# Altium PCB Transmitter .PcbDoc
Units mm, origin at the board's own origin, x right, y up, seen from the top; angles counter-clockwise.
Board outline 55.3 x 85.53 mm, 2 copper layers (Top Layer, Bottom Layer); 41 components, 32 nets, 141 pads, 30 vias.
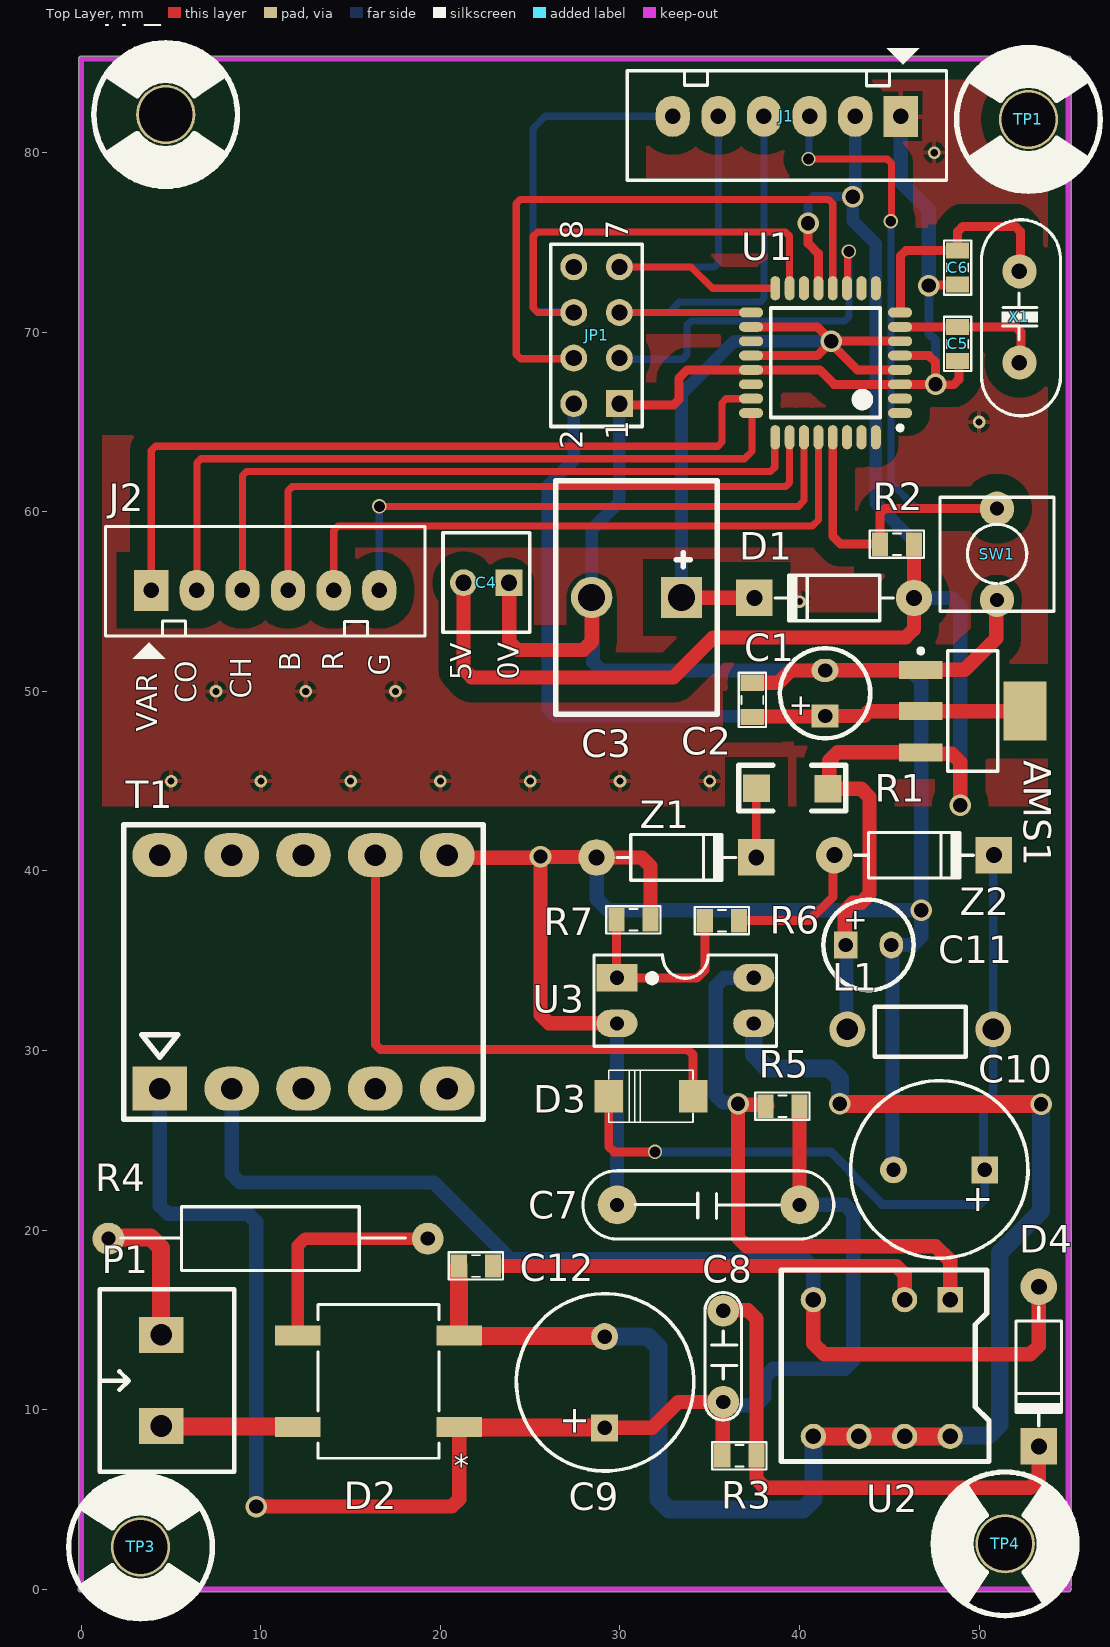
[diagram p0: Top Layer view]
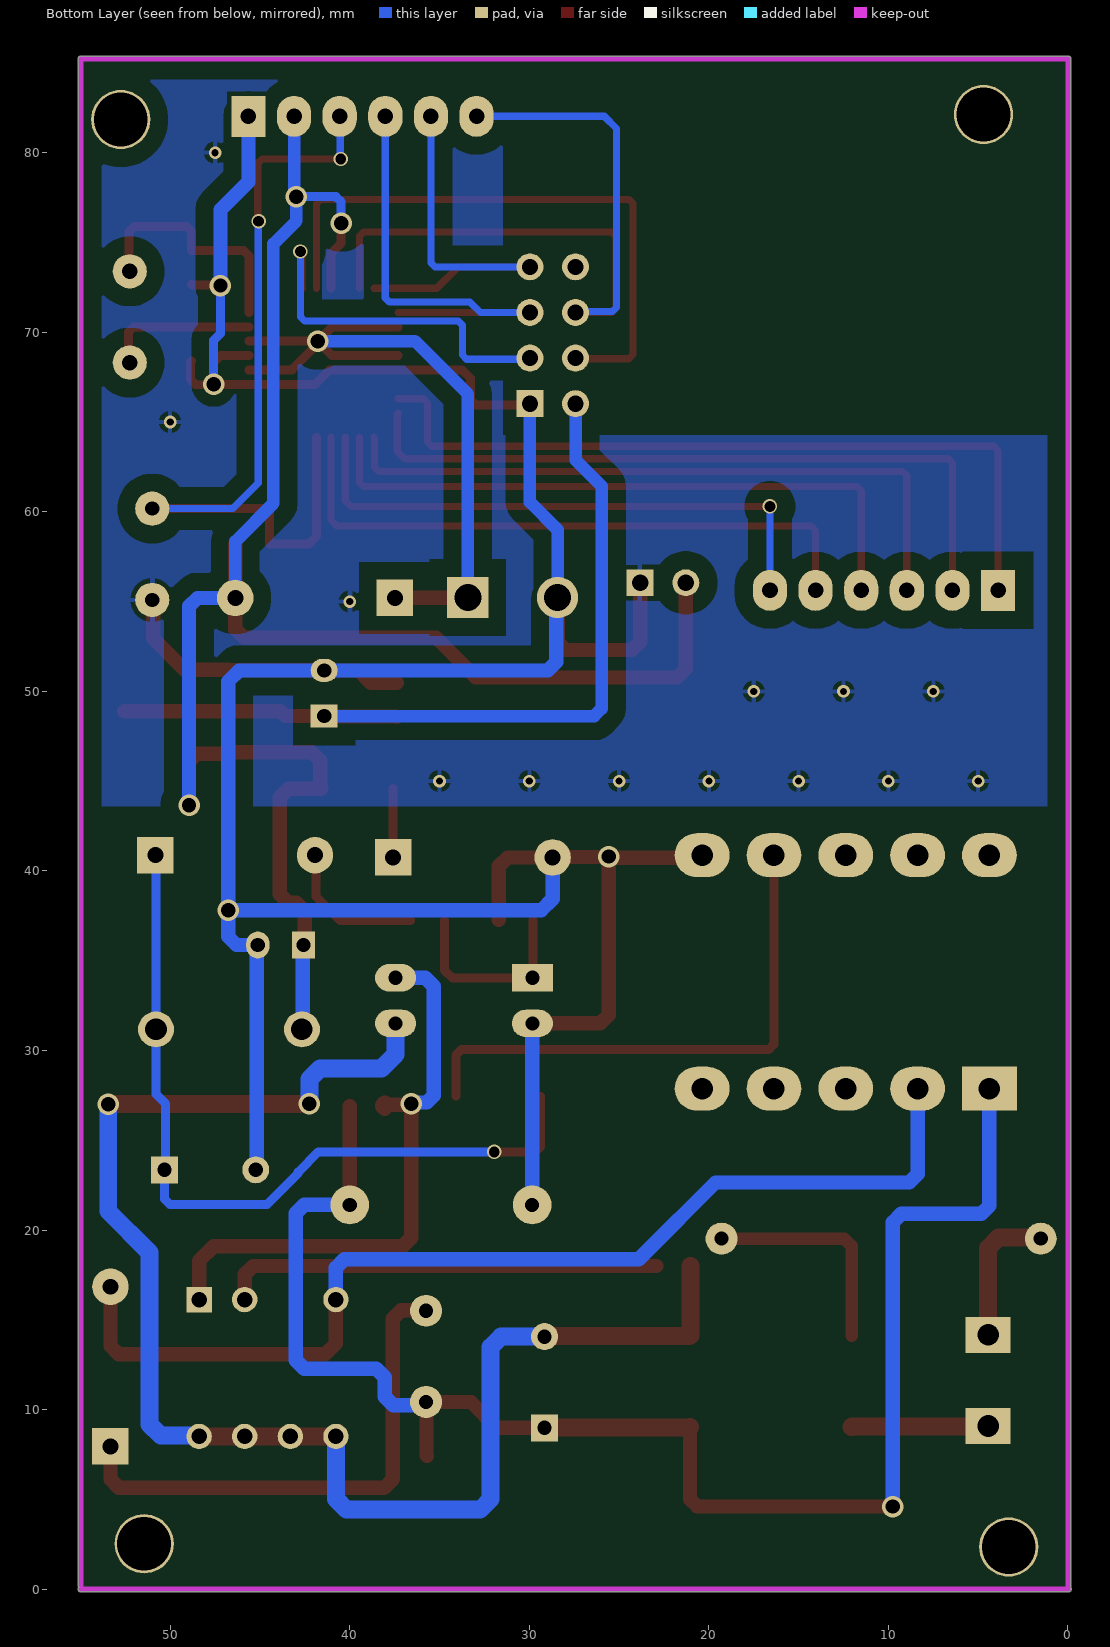
[diagram p1: Bottom Layer view, seen from below]
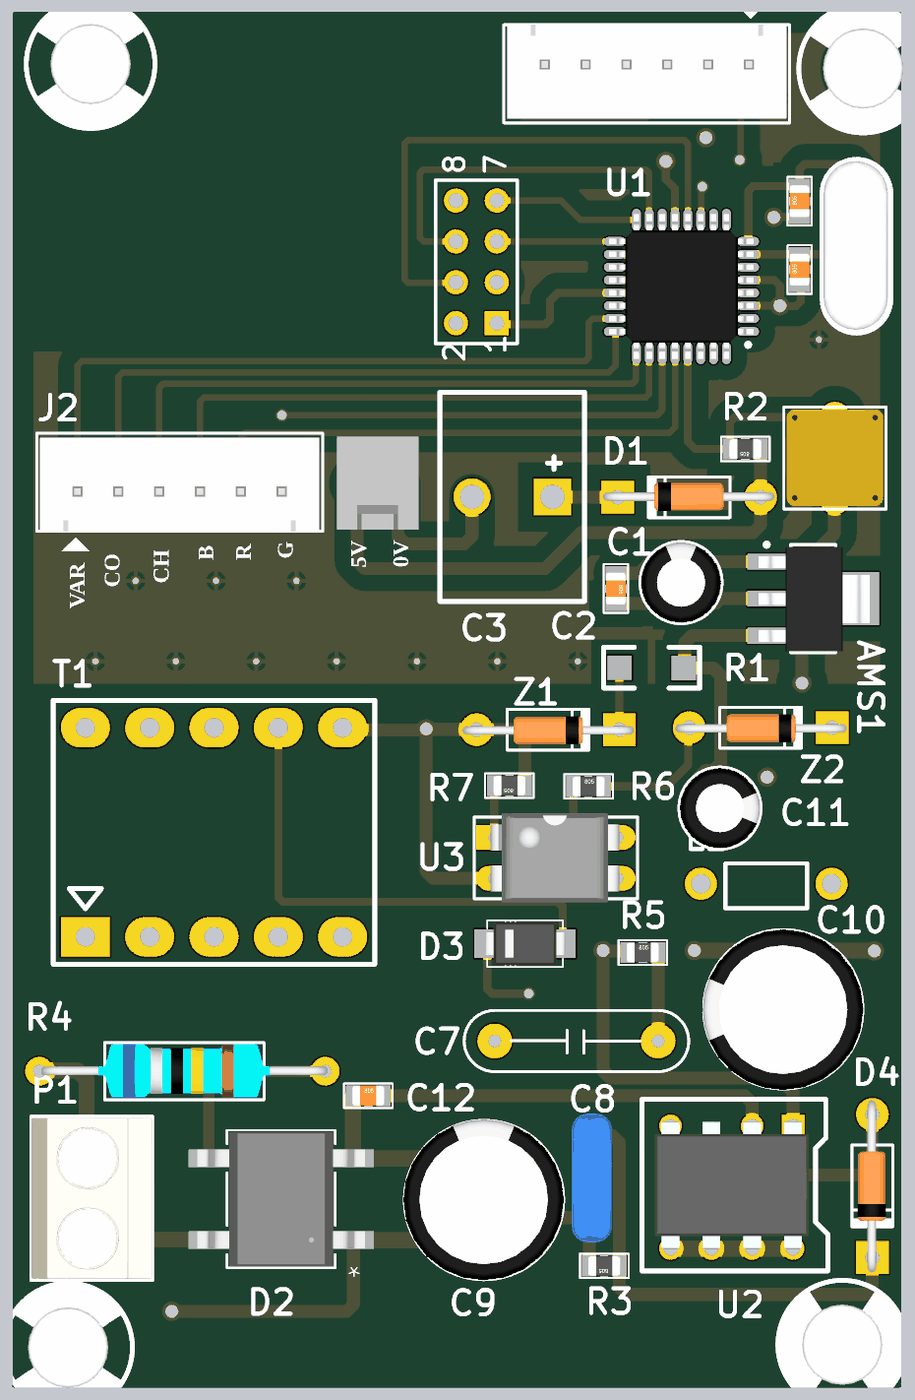
[diagram p2: 3D render of the assembled board from above, using the file's embedded part models]

## Layer stack, top to bottom
Top Solder: solder mask 0.0102, Solder Resist, Dk 3.5
Top Layer: signal copper 0.0356
Dielectric 1: dielectric 0.32, FR-4, Dk 4.8
Bottom Layer: signal copper 0.0356
Bottom Solder: solder mask 0.0102, Solder Resist, Dk 3.5

## Board outline
-0.15,0.083 ccw(c-0.025,0) -0.025,-0.15 54.975,-0.15 ccw(c54.975,0) 55.125,0 ccw(c54.975,0) 55.075,0.112 ccw(c54.975,0.225) 55.125,0.225 55.125,85.225 ccw(c54.975,85.225) 54.975,85.375 0,85.375 ccw(c0,85.225) -0.15,85.225

## Design rules (kind name [scope] priority, off if disabled: settings)
Clearance [All] p1: gap=1 ignorepadtopadclearanceinfootprint=FALSE
PolygonConnect [All] p1: connectstyle=Relief reliefconductorwidth=0.254 reliefentries=4 polygonreliefangle="90 Angle" airgapwidth=0.254
RoutingVias [InNetClass('AC')] p1: holewidth=0.8 width=1.2 viastyle="Through Hole" minholewidth=0.8 minwidth=1.2 maxholewidth=0.8 maxwidth=1.2
RoutingVias RoutingVias_1 [InNetClass('DC')] p2: holewidth=0.8 width=1.2 viastyle="Through Hole" minholewidth=0.8 minwidth=1.2 maxholewidth=0.8 maxwidth=1.2
RoutingVias RoutingVias_2 [InNetClass('All Nets')] p3: holewidth=0.6 width=0.8 viastyle="Through Hole" minholewidth=0.6 minwidth=0.8 maxholewidth=0.6 maxwidth=0.8
SolderMaskExpansion [All] p1: expansion=0.102 istentingtop=FALSE
Width [InNetClass('AC')] p1: maxlimit=1 minlimit=0.7 preferedwidth=0.8
Width Width_1 [InNetClass('DC')] p2: maxlimit=0.8 minlimit=0.5 preferedwidth=0.7
Width Width_2 [InNetClass('All Nets')] p3: maxlimit=0.5 minlimit=0.3 preferedwidth=0.4
30 further rules are at their usual default settings.

## Components (designator, comment, footprint, x,y, rotation, side; value= is the part's Value field where it differs from the comment)
AMS1 "AMS1117 3V3" SOT223-4N 49.65,48.9 r0 top
C1 "22uF" C5mm 41.425,49.895 r90 top
C2 "104" CN-SMD-0805 37.375,49.525 r270 top
C3 "0.1F" "SUP CAP" 33.425,55.225 r180 top
C4 "Header2" HDR2 23.825,56.05 r180 top
C5 "22P" CN-SMD-0805 48.8,69.35 r90 top value=100pF
C6 "22P" CN-SMD-0805 48.8,73.6 r90 top value=100pF
C7 "1nF" CN4 40,21.4 r180 top value=0,047uF
C8 "1nF" CN2 35.75,15.505 r270 top value=0.1uF
C9 "4.7uF 400V" C10mm 29.15,11.525 r90 top
C10 "470uF 25V" C10mm 47.775,23.35 r180 top
C11 "Cap Pol 5mm" C5mm 43.845,35.875 r0 top
C12 "104" CN-SMD-0805 21.975,18 r0 top
D1 "1N4007" D1A 46.375,55.2 r0 top
D2 "Diode bridge" DS207S 16.55,11.575 r180 top
D3 "SS16" SS14 31.725,27.45 r180 top
D4 "FR107" D1A 53.325,16.84 r90 top value=1N4007
J1 "ISP" Header6 45.64,82.025 r180 top
J2 "ISP" Header6 3.895,55.625 r0 top
JP1 "nRF24L01+" HDR2X4 29.965,66.02 r90 top
L1 "Ferrit Bead" "CUON CAM" 46.725,31.175 r180 top
P1 "Header 2 - M" "Medium - Header 2" 4.45,11.625 r90 top
R1 "0R" 1206_R 39.734,44.956 r0 top value="R1/4W - 1K"
R2 "10K" RES-SMD-0805 45.425,58.2 r180 top value="R1/4W - 1K"
R3 "47k" RES-SMD-0805 36.65,7.425 r180 top value="R1/4W - 1K"
R4 "10R" RES-1W-LONG 10.15,19.65 r0 top value="R1W - 100"
R5 "4M" RES-SMD-0805 39.05,26.9 r0 top value="R1/4W - 1K"
R6 "390" RES-SMD-0805 35.675,37.225 r0 top value="R1/4W - 1K"
R7 "2k" RES-SMD-0805 30.75,37.275 r180 top value="R1/4W - 1K"
SW1 "SW" SW2 51,60.175 r270 top value="SW chip 2 pin"
T1 "EE25" "EE19 5+5" 4.375,27.875 r0 top
TP1 "1" "Holle 3mm 8mm" 52.75,81.85 r0 top
TP2 "1" "Holle 3mm 8mm" 4.7,82.125 r0 top
TP3 "1" "Holle 3mm 8mm" 3.3,2.35 r0 top
TP4 "1" "Holle 3mm 8mm" 51.45,2.525 r90 top
U1 "ATmega328-AU" TQFP32 41.45,68.3 r180 top
U2 "TNY276" PCBComponent_1 44.834,12.442 r270 top
U3 "PC817" DIP4/W0.3 29.83,34.05 r270 top
X1 "16Mhz" XT2 52.25,70.85 r270 top value=4Mhz
Z1 "4.3V" D1A 28.7,40.75 r180 top
Z2 "5V" D1A 41.935,40.875 r180 top

## Footprints (in the part's own frame and the unit in brackets; to place one, negate y for a bottom-side part, rotate by r counter-clockwise, add the part's x,y. Pads: shape width x height; smd on the part's side, far side on the other; paste and mask are expansions set on the pad)
1206_R [mil]
  rect 60x60 smd: 1(-84,-14) 2(73,-15)
  silkscreen extent -123,-64 112,36
C5mm [mm]
  rect 1.3x1.5 hole 0.8: 1(-1.27,0)
  oval 1.3x1.5 hole 0.8: 2(1.27,0)
  silkscreen extent -2.51,-2.51 2.51,2.51, body extent -2.5,-2.5 2.49,2.5, height 11.01
C10mm [mm]
  rect 1.5x1.5 hole 0.8: 1(-2.54,0)
  round 1.5 hole 0.8: 2(2.54,0)
  silkscreen extent -4.95,-4.96 4.93,4.92, body extent -5,-5 4.97,5, height 20.01
CN2 [mil]
  round 70 hole 31: 1(0,0) 2(200,0)
  silkscreen extent -40,-40 240,40, body extent -54,-44 260,55, height 407
CN4 [mil] "Cap np W 0.4"
  round 85 hole 31: 1(0,0) 2(400,0)
  silkscreen extent -75,-75 475,75
CN-SMD-0805 [mm]
  rect 0.9x1.3 smd: 1(-0.95,0) 2(0.95,0)
  silkscreen extent -1.51,-0.76 1.51,0.76, body extent -1,-0.62 1,0.63, height 0.8
"CUON CAM" [mm] "Dang cam giong tro"
  round 2 hole 1.2: 1(-4.064,0) 2(4.064,0)
  silkscreen extent -2.54,-1.27 2.54,1.52
D1A [mil] "Diode 1A, W 100mil, L 350mil"
  round 80 hole 35: 1(0,0)
  rect 80x80 hole 35: 2(-350,0)
  silkscreen extent -305,-50 -45,50, body extent -386,-33 34,36, height 84
DIP4/W0.3 [mil] "4 PIN, W 300mil, Pin to pin 100mil"
  rect 60x90 hole 31: 1(0,0)
  oval 60x90 hole 31: 2(100,0) 3(100,300) 4(0,300)
  silkscreen extent -50,-50 150,350, body extent -59,-10 159,305, height 170
DS207S [mm]
  rect 2.518x1.117 smd paste+0 mask+0: 1(-4.498,2.54) 2(-4.498,-2.54) 3(4.498,-2.54) 4(4.498,2.54)
  silkscreen extent -3.37,-4.28 3.37,4.28, body extent -5.21,-4.15 5.21,4.15, height 3.63
"EE19 5+5" [mm]
  rect 3.05x2.45 hole 1.2 paste+0 mask+0.102: 1(0,0)
  oval 3.05x2.45 hole 1.2 paste+0 mask+0.102: 2(4,0) 3(8,0) 4(12,0) 5(16,0) 6(16,13) 7(12,13) 8(8,13) 9(4,13) 10(0,13)
  silkscreen extent -2,-1.7 18,14.7
HDR2 [mm] "Connector; Header; 2 Position"
  rect 1.5x1.5 hole 0.9: 1(0,0)
  round 1.5 hole 0.9: 2(2.54,0)
  silkscreen extent -1.14,-2.79 3.68,2.77, body extent -1.27,-2.92 3.81,2.88, height 11.72
HDR2X4 [mm] "Connector; Header; 4x2 Position"
  rect 1.5x1.5 hole 0.9: 1(0,0)
  round 1.5 hole 0.9: 2(0,2.54) 3(2.54,0) 4(2.54,2.54) 5(5.08,0) 6(5.08,2.54) 7(7.62,0) 8(7.62,2.54)
  silkscreen extent -1.27,-1.27 8.89,3.81
Header6 [mil] "CON6"
  rect 75x90 hole 34: 1(0,0)
  oval 75x90 hole 34: 2(100,0) 3(200,0) 4(300,0) 5(400,0) 6(500,0)
  silkscreen extent -100,-150 600,140, body extent -92,-101 592,129, height 284
"Holle 3mm 8mm" [mm] "Holle 3mm, outline 8mm"
  round 3.3 hole 3: 1(0,0)
  silkscreen extent -4,-4 4,4, body extent -2.5,-2.5 2.5,2.5, height 1.73
"Medium - Header 2" [mm]
  rect 2x2.5 hole 1.2: 1(-2.54,0) 2(2.54,0)
  silkscreen extent -5.08,-4.08 5.08,3.43, body extent -5,-4.07 5,3.43, height 10
PCBComponent_1 [mm]
  rect 1.41x1.41 hole 0.86: 1(-3.683,3.556)
  round 1.41 hole 0.86: 2(-3.683,1.016) 4(-3.683,-4.064) 5(3.937,-4.064) 6(3.937,-1.524) 7(3.937,1.016) 8(3.937,3.556)
  silkscreen extent -5.33,-5.84 5.33,5.72, body extent -3.95,-5.04 3.95,4.53, height 4.06
RES-1W-LONG [mil]
  round 70 hole 31: 1(-340,-5) 2(360,-5)
  silkscreen extent -313,-75 311,65, body extent -336,-70 366,62, height 142
RES-SMD-0805 [mm]
  rect 0.9x1.3 smd: 1(-0.95,0) 2(0.95,0)
  silkscreen extent -1.51,-0.76 1.51,0.76, body extent -1,-0.62 1,0.63, height 0.8
SOT223-4N [mm] "SOT223, 4-Leads, Body 6.5x3.5mm, Pitch 2.3mm, Lead Span 7mm, IPC Medium Density"
  rect 2.4x1 smd: 1(-2.9,2.3) 2(-2.9,0) 3(-2.9,-2.3)
  rect 2.4x3.3 smd: 4(2.9,0)
  silkscreen extent -3.02,-3.35 1.4,3.47, body extent -3.39,-3.27 3.5,3.23, height 1.72
SS14 [mm] "Diode Schottly 1N5819"
  rect 1.6x1.8 smd paste+0 mask+0.102: 1(-2.35,0) 2(2.35,0)
  silkscreen extent -2.35,-1.45 2.35,1.45, body extent -2.5,-1.35 2.5,1.35, height 2.28
"SUP CAP" [mm] "Super capacitor 0.1F 5.5V"
  rect 2.3x2.3 hole 1.5 paste+0 mask+0.102: 1(0,0)
  round 2.3 hole 1.5 paste+0 mask+0.102: 2(5,0)
  silkscreen extent -2,-6.5 7,6.5
SW2 [mil] "SW button 2pin, 250x 250 mil"
  round 75 hole 31: 1(0,0) 2(200,0)
  silkscreen extent -25,-125 225,125, body extent -19,-118 217,118, height 177
TQFP32 [mm] "Thin QFP, 32-Leads, Body 9x9mm, Pitch 0.8mm, IPC Low Density"
  oval 1.35x0.55 smd: 1(-4.15,2.8) 2(-4.15,2) 3(-4.15,1.2) 4(-4.15,0.4) 5(-4.15,-0.4) 6(-4.15,-1.2) 7(-4.15,-2) 8(-4.15,-2.8) 17(4.15,-2.8) 18(4.15,-2) 19(4.15,-1.2) 20(4.15,-0.4) 21(4.15,0.4) 22(4.15,1.2) 23(4.15,2) 24(4.15,2.8)
  oval 0.55x1.35 smd: 9(-2.8,-4.15) 10(-2,-4.15) 11(-1.2,-4.15) 12(-0.4,-4.15) 13(0.4,-4.15) 14(1.2,-4.15) 15(2,-4.15) 16(2.8,-4.15) 25(2.8,4.15) 26(2,4.15) 27(1.2,4.15) 28(0.4,4.15) 29(-0.4,4.15) 30(-1.2,4.15) 31(-2,4.15) 32(-2.8,4.15)
  silkscreen extent -4.28,-3.05 3.05,3.75, body extent -4.5,-4.5 4.5,4.5, height 1.4
XT2 [mil] "Footpin for Crystal 2 pin"
  round 75 hole 34: 1(-100,0) 2(100,0)
  silkscreen extent -213,-83 217,90, body extent -216,-87 216,90, height 144

## Part data
AMS1: library part AMS1117, "AMS"
C1 C3: library part "Cap Pol 5mm", "Polarized Capacitor (Axial)", LatestRevisionDate=17-Jul-2002, LatestRevisionNote="Re-released for DXP Platform.", PackageReference=POLAR0.8, Published=8-Jun-2000, Publisher="Altium Limited"
C2 C12: library part "CAP 33P_0805"
C4: "Header IDC, 2 x 1 Pin Vertical 2.54mm Pitch (Non-Boxed, Male)", Manufacturer="W¨¹rth Elektronik eiSos GmbH", PartNo=613002143121, ComponentLink1 Description=Manufacturer, ComponentLink1URL=http://www.we-online.com, ComponentLink2 Description=Datasheet, ComponentLink2URL=http://katalog.we-online.de/em/datasheet/6130xx143121.pdf, Created by="Karrer Zheng", Created Date="29 March 2013", NoPins=02
C5 C6: library part CN1, "Cap np  1pF - 472pF"
C7: library part CN3, "Cap np W0.3", Copyright=VanDungEvn
C8: library part CN2, "Cap np 104 => 105pF"
C9 C10: library part "Cap Pol 8mm", "Polarized Capacitor (Axial)", LatestRevisionDate=17-Jul-2002, LatestRevisionNote="Re-released for DXP Platform.", PackageReference=POLAR0.8, Published=8-Jun-2000, Publisher="Altium Limited"
C11: "Polarized Capacitor (Axial)", LatestRevisionDate=17-Jul-2002, LatestRevisionNote="Re-released for DXP Platform.", PackageReference=POLAR0.8, Published=8-Jun-2000, Publisher="Altium Limited"
D1 D4: library part D1A, "Diode 1A"
D2: library part DS207S, "Diode cau 2A 1000V"
D3: library part "Diode SS14 ( 1N5819)", "Dán", Chung_Loai=Dán, Don_Vi=Con, Ma_Hang=MH002211, Ten_Linh_Kien="Diode SS14 DO214 Schottky 1A 40V ( 1N5819 DO214)"
J1 J2: library part "JUMP 6", "JUMP DON DUC 2.54"
JP1: library part "JUMP DOI-4", "JUMP DOI DUC", LatestRevisionDate=17-Jul-2002, LatestRevisionNote="Re-released for DXP Platform.", Publisher="Altium Limited"
L1: library part "CUON CAM 470uH DIP", "Cuộn lọc RH3.5x9x0.8 Cắm", Chung_Loai=Cắm, Don_Vi=Con, Ma_Hang=MH002232, Ten_Linh_Kien="Cuộn Cảm 470uH 3A 8x10MM"
P1: "Header, 2-Pin, Medium", LatestRevisionDate=17-Jul-2002, LatestRevisionNote="Re-released for DXP Platform.", Publisher="Altium Limited"
R1 R2 R3 R5 R6 R7: library part R1/4W, "Resistor 1/4W"
R4: library part R1W, "Resistor 1W"
SW1: library part SW2, "Switch button 2 pin"
T1: "EE25 10PIN"
TP1 TP2 TP3 TP4: library part TP, "CONNECT 1"
U1: "8-bit AVR Microcontroller, 32KB Flash, 1KB EEPROM, 2KB SRAM, 32-pin TQFP, Industrial Grade (-40°C to 85°C)", Supplier Part Number 1=ATMEGA328-AU-ND, Code_JEDEC=MS-026-ABA, ComponentLink1Description="Manufacturer Link", ComponentLink1URL=http://www.atmel.com/products/avr/default.asp?, ComponentLink2Description="ATmega48A/48PA/88A/88PA/168A/168PA/328/328P Datasheet", ComponentLink2URL=http://www.atmel.com/dyn/resources/prod_documents/8271.pdf, ComponentLink3Description="ATmega48A/48PA/88A/88PA/168A/168PA/328/328P Summary", ComponentLink3URL=http://www.atmel.com/dyn/resources/prod_documents/8271S.pdf, ComponentLink4Description="Atmel.com Home", ComponentLink4URL=http://www.atmel.com, DatasheetVersion="revA, Jan-2010", PackageDescription="32-Lead, 7x7x1.0 mm Body, 0.8mm Lead Pitch, Thin Profile Plastic Quad Flat Package (TQFP)", PackageReference=32A, PackageVersion="revB, Oct-2001", Published=1-Apr-2010, Publisher="Altium Limited", Supplier 1=Digi-Key, Supplier 2=Mouser, Supplier Part Number 2=556-ATMEGA328-AU
U2: "TNY274-280 / TinySwitch-III Family - DIP/PDIP-8C"
U3: "Single Opto"
X1: library part XT2, "Crystal For all Crystal 2pin."
Z1 Z2: library part "Diode Zener", "Diode  Zener"

## Via types
v1: diameter 0.7, hole 0.4, Top Layer to Bottom Layer, tented both sides, 13 vias
v2: diameter 1.2, hole 0.8, Top Layer to Bottom Layer, tented both sides, 12 vias
v3: diameter 0.8, hole 0.6, Top Layer to Bottom Layer, tented both sides, 5 vias

## Nets (pads, with @x,y where several pads share a name; then routed paths per layer and width w, separated by ;. In a path a pad name is that pad's centre, name@x,y a point inside that pad or via, vN(x,y) a via of type N, cw(c..) or ccw(c..) an arc to the next point about the centre after c; other vN are vias at no path point)
3V3: AMS1.2 AMS1.4 C1.1 C2.2 JP1.2 | length 48.5
  Top Layer w0.8: C2.2 37.4,48.6 41.4,48.6 C1.1 43.6,48.625 43.875,48.9 AMS1.2 AMS1.4
  Bottom Layer w0.7: JP1.2 27.425,62.875 25.975,61.425 25.975,49.035 26.385,48.625 C1.1
AC1: D2.4 P1.1 | length 7.6
  Top Layer w1: P1.1 4.475,9.06 12.027,9.06 D2.4
AC2: P1.2 R4.1 | length 8
  Top Layer w1: R4.1 1.566,19.575 3.864,19.575 4.45,18.989 P1.2
BLUE: J2.4 U1.26 | length 36.2
  Top Layer w0.4: J2.4 11.515,61.166 11.749,61.4 39.216,61.4 39.45,61.634 U1.26
BP/M: C12.2 U2.2 | length 24.5
  Top Layer w0.8: C12.2 45.381,18 45.85,17.531 U2.2
CE: JP1.3 U1.11 | length 20.5
  Top Layer w0.4: U1.11 42.675,72.475 42.675,74.425 v3(42.75,74.5)
  Bottom Layer w0.4: JP1.3 30.025,68.5 33.491,68.5 33.725,68.734 33.725,70.391 33.959,70.625 42.516,70.625 42.75,70.859 v3(42.75,74.5)
CHANNEL: J2.3 U1.25 | length 37.9
  Top Layer w0.4: J2.3 8.975,62.016 9.209,62.25 38.387,62.25 38.621,62.484 38.621,64.121 U1.25
COLOR: J2.2 U1.24 | length 40.4
  Top Layer w0.4: J2.2 6.435,62.716 6.669,62.95 36.941,62.95 37.35,63.359 37.35,65.45 U1.24
CS: JP1.4 U1.12 | length 34.3
  Top Layer w0.4: JP1.4 27.39,68.525 24.459,68.525 24.225,68.759 24.225,77.166 24.459,77.4 41.616,77.4 41.85,77.166 U1.12
D: D4.1 T1.2 U2.4 | length 59.8
  Top Layer w0.8: U2.4 40.77,13.68 41.375,13.075 52.856,13.075 53.325,13.544 D4.1
  Bottom Layer w0.8: T1.2 8.375,23.119 8.844,22.65 19.625,22.65 23.6,18.675 23.9,18.375 40.301,18.375 40.77,17.906 U2.4
EN/UV: R5.1 U2.1 U3.4 | length 33.7
  Top Layer w0.8: v2@36.575,26.987 36.575,19.569 37.044,19.1 47.571,19.1 48.39,18.281 U2.1 ; v2@36.613,26.987 R5.1@38.05,26.987 ; R5.1@38.05,26.759 38.1,26.809 R5.1
  Top Layer w1: v2(36.575,27.025) v2@36.613,26.987 ; U3.4 U3.4@37.55,33.95 ; R5.1@38.05,26.987 38.1,26.937 R5.1
  Bottom Layer w0.8: v2(36.575,27.025) 36.498,27.102 35.717,27.102 35.325,27.494 35.325,33.581 35.794,34.05 U3.4
GND: AMS1.1 C1.2 C2.1 C3.2 C4.1 C5.1 C6.1 C7.2 C10.2 C11.2 J1.1 JP1.1 R7.1 SW1.2 T1.6 U1.3 U1.5 U1.21 U3.2 Z1.1 | length 191.2
  Top Layer w0.5: JP1.1 30.035,65.95 32.982,65.95 33.275,66.243 33.275,67.425 33.75,67.9 U1.21 41.125,67.9 41.925,67.1 U1.3 v2(47.575,67.1) ; U1.5 47.21,68.7 47.575,68.335 v2(47.575,67.1) ; v2(47.2,72.6) 47.225,72.625 48.775,72.625 C6.1 ; C5.1 48.875,68.325 48.875,67.368 48.582,67.075 47.6,67.075 v2(47.575,67.1)
  Top Layer w0.8: T1.6 20.525,40.725 25.5,40.725 v2(25.575,40.8) ; C4.1 23.825,52.769 24.294,52.3 27.956,52.3 28.425,52.769 C3.2 ; U3.2 26.044,31.51 25.575,31.979 v2(25.575,40.8) ; R7.1 31.7,40.256 31.206,40.75 Z1.1 28.675,40.775 25.6,40.775 v2(25.575,40.8) ; C2.1 38.825,50.475 39.515,51.165 C1.2 41.442,51.182 46.732,51.182 AMS1.1 49.206,51.2 50.949,52.943 50.949,55.044 SW1.2
  Bottom Layer w0.5: v2(47.2,72.6) 47.2,69.925 47.575,69.55 v2(47.575,67.1)
  Bottom Layer w0.7: C3.2 28.425,59 29.965,60.54 JP1.1
  Bottom Layer w0.8: C3.2 28.5,55.15 28.5,51.634 28.969,51.165 C1.2 46.16,51.165 46.775,50.55 v2(46.775,37.8) ; Z1.1 28.7,38.444 29.344,37.8 v2(46.775,37.8) ; U3.2 29.835,31.505 29.835,21.405 C7.2 ; C10.2 45.175,23.41 45.175,35.815 C11.2 46.306,35.875 46.775,36.344 v2(46.775,37.8) ; J1.1 45.64,78.385 47.2,76.825 v2(47.2,72.6)
  other v1: 5,45 10,45 15,45 20,45 25,45 30,45 35,45 7.5,50 12.5,50 17.5,50 40,55 50,65 47.5,80
GREEN: J2.6 U1.27 | length 32
  Top Layer w0.4: v3(16.6,60.3) 39.925,60.3 40.25,60.625 U1.27
  Bottom Layer w0.4: J2.6 16.598,55.627 16.598,60.297 v3(16.6,60.3)
MASS: C9.2 C12.1 D2.2 U2.5 U2.6 U2.7 U2.8 U3.3 | length 85.6
  Top Layer w0.7: D2.2@21.025,14.138 D2.2
  Top Layer w1: D2.2@21.025,14.138 C12.1 ; D2.2 21.073,14.09 29.125,14.09 C9.2 C9.2@29.215,14 ; U2.5 U2.6 U2.7 U2.8 ; v2(42.25,27.025) v2@53.45,27.025
  Bottom Layer w1: C9.2 29.16,14.075 31.564,14.075 32.15,13.489 32.15,5.011 32.736,4.425 40.184,4.425 40.77,5.011 U2.5 ; U3.3 37.45,29.775 38.225,29 41.664,29 42.25,28.414 v2(42.25,27.025) ; U2.8 48.435,8.55 50.525,8.55 51.15,9.175 51.15,18.75 53.45,21.05 v2(53.45,27)
MISO: J1.5 JP1.7 U1.16 | length 22.9
  Top Layer w0.4: JP1.7 33.96,73.64 35.15,72.45 U1.16
  Bottom Layer w0.4: JP1.7 35.246,73.64 35.48,73.874 J1.5
MOSI: J1.6 JP1.6 U1.15 | length 44.1
  Top Layer w0.4: JP1.6 25.425,71.1 25.175,71.35 25.175,75.341 25.409,75.575 39.216,75.575 39.45,75.341 U1.15
  Bottom Layer w0.4: JP1.6 27.375,71.15 25.384,71.15 25.15,71.384 25.15,81.35 25.825,82.025 J1.6
NetC7_1: C7.1 C8.2 C9.1 D2.1 R3.2 R5.2 T1.1 | length 87.8
  Top Layer w0.8: v2(9.75,4.6) 20.638,4.6 21.048,5.01 D2.1 ; C9.1 31.81,8.985 33.25,10.425 C8.2 35.725,10.4 35.725,7.45 R3.2 ; C7.1 R5.2
  Top Layer w1: D2.1 21.073,9.01 29.125,9.01 C9.1
  Bottom Layer w0.4: 4.375,21.35 4.413,21.312
  Bottom Layer w0.8: 4.375,21.35 T1.1 ; 4.413,21.312 4.825,20.9 9.281,20.9 9.75,20.431 v2(9.75,4.6) ; C8.2 35.937,10.238 37.581,10.238 38.05,10.706 38.05,11.806 38.519,12.275 42.531,12.275 43,12.744 43,20.931 42.531,21.4 C7.1
NetC8_1: C8.1 D4.2 R3.1 | length 28.9
  Top Layer w0.8: C8.1 35.777,15.532 37.131,15.532 37.6,15.063 37.6,6.119 38.069,5.65 52.856,5.65 53.325,6.119 D4.2
NetC10_1: C10.1 D3.2 L1.1 Z2.2 | length 44.7
  Top Layer w0.5: D3.2 29.375,24.643 29.668,24.35 v3(31.95,24.35)
  Bottom Layer w0.5: v3(31.95,24.35) 41.75,24.35 42.875,23.225 42.875,23.15 44.6,21.425 50.022,21.425 50.315,21.718 C10.1 50.25,23.415 50.25,27.025 50.789,27.564 L1.1 50.789,40.839 Z2.2
NetD2_3: D2.3 R4.2 | length 12.4
  Top Layer w0.7: D2.3 12.052,19.113 12.462,19.523 R4.2
NetD3_1: D3.1 T1.7 | length 30.8
  Top Layer w0.5: T1.7 16.375,30.343 16.668,30.05 33.782,30.05 34.075,29.757 D3.1
NetR1_1: R1.1 Z1.2 | length 3.9
  Top Layer w0.5: Z1.2 37.59,44.59 R1.1
NetR6_1: R6.1 R7.2 U3.1 | length 11.1
  Top Layer w0.5: R7.2 29.8,34.08 U3.1 29.855,34.025 34.275,34.025 34.725,34.475 R6.1
NetR6_2: R6.2 Z2.1 | length 8.1
  Top Layer w0.5: R6.2 40.525,37.225 41.869,38.569 41.869,40.809 Z2.1
RED: J2.5 U1.28 | length 35.2
  Top Layer w0.4: J2.5 14.055,58.966 14.289,59.2 40.7,59.2 41.05,59.55 U1.28
RESET: J1.3 R2.2 SW1.1 U1.29 | length 48.1
  Top Layer w0.4: v3(40.5,79.65) 44.891,79.65 45.125,79.416 45.125,76.225 v3(45.075,76.175)
  Top Layer w0.5: U1.29 41.85,58.643 42.293,58.2 R2.2 44.475,59.882 44.768,60.175 SW1.1
  Bottom Layer w0.4: v3(40.5,79.65) 40.53,79.68 40.53,81.995 J1.3 ; v3(45.075,76.175) 45.1,76.15 45.1,61.6 46.525,60.175 SW1.1
SCK: J1.4 JP1.5 U1.17 | length 25.8
  Top Layer w0.4: JP1.5 U1.17
  Bottom Layer w0.4: JP1.5 32.725,71.1 33.3,71.675 37.786,71.675 38.02,71.909 J1.4
VAR: J2.1 U1.23 | length 43.7
  Top Layer w0.4: J2.1 3.895,63.416 4.129,63.65 35.441,63.65 35.675,63.884 35.675,66.066 35.909,66.3 U1.23
VCC: AMS1.3 C4.2 C11.1 D1.1 J1.2 L1.2 R1.2 R2.1 U1.13 | length 114.1
  Top Layer w0.5: v2(40.475,76.075) 40.475,74.95 41.05,74.375 U1.13
  Top Layer w0.8: C4.2 21.285,51.244 21.754,50.775 32.975,50.775 35.2,53 45.906,53 46.375,53.469 D1.1 R2.1 ; C11.1@42.8,35.65 C11.1 42.513,35.937 42.513,37.756 42.981,38.225 43.431,38.225 43.9,38.694 43.9,44.106 43.431,44.575 R1.2 41.65,44.637 41.65,46.131 42.119,46.6 AMS1.3 46.816,46.534 48.481,46.534 48.95,46.066 v2(48.95,43.65)
  Bottom Layer w0.5: v2(40.475,76.075) 40.475,77.254 40.768,77.547 v2(42.971,77.547)
  Bottom Layer w0.7: J1.2 43.1,77.812 42.971,77.682 v2(42.971,77.547) 42.971,76.204 44.25,74.925 44.25,60.475 46.375,58.35 D1.1
  Bottom Layer w0.8: C11.1 42.618,35.832 42.618,31.218 L1.2 ; D1.1 48.481,55.2 48.95,54.731 v2(48.95,43.65)
VCC1: C3.1 D1.2 U1.4 U1.6 U1.18 U1.20 | length 43
  Top Layer w0.5: U1.20 40.975,68.7 v2(41.775,69.5) ; U1.18 40.975,70.3 v2(41.775,69.5) ; U1.4 43.225,67.9 41.775,69.35 v2(41.775,69.5) ; U1.6 v2(41.775,69.5)
  Top Layer w0.8: C3.1 33.438,55.212 37.473,55.212 D1.2
  Bottom Layer w0.7: C3.1 33.425,66.55 36.375,69.5 v2(41.775,69.5)
XTAL1: C5.2 U1.7 X1.2 | length 8.6
  Top Layer w0.5: U1.7 C5.2 52.032,70.3 52.325,70.007 52.325,68.385 X1.2
XTAL2: C6.2 U1.8 X1.1 | length 13.5
  Top Layer w0.5: U1.8 45.623,71.123 45.623,74.257 45.916,74.55 C6.2 48.8,75.607 49.093,75.9 52.007,75.9 52.3,75.607 52.3,73.44 X1.1
pads on no net: JP1.8 T1.3 T1.4 T1.5 T1.8 T1.9 T1.10 TP1.1 TP2.1 TP3.1 TP4.1 U1.1 U1.2 U1.9 U1.10 U1.14 U1.19 U1.22 U1.30 U1.31 U1.32

## Polygon pours and split planes (outlines as drawn)
GND on Top Layer "GND_L01_P000" (solid, pour order 0): 0,85.25 55,85.25 55,43.6 0,43.6
GND on Bottom Layer "GND_L02_P001" (solid, pour order 1): -0.006,85.251 54.994,85.251 54.994,43.601 -0.006,43.601

## Keep-outs
Keep-Out Layer:
  lines w0.3: -0.025,0 54.975,0 ; 0,0 0,85.225 54.975,85.225 54.975,0.225

## Other copper
Top Layer:
  pour cut-out: 0,85.225 31.475,85.225 31.475,64.25 0,64.25 0,85.225 -0.025,85.25
Bottom Layer:
  pour cut-out: 0,85.225 31.475,85.225 31.475,64.25 0,64.25 0,85.225 -0.025,85.25

## Silkscreen, mask and mechanical layers (free items; w line width, h text height)
Top Overlay:
  text "R" at 14.975,51.144 h2 r90
  text "B" at 12.575,51.107 h2 r90
  text "G" at 17.575,50.863 h2 r90
  text "0V" at 24.75,50.636 h2 r90
  text "5V" at 22.1,50.611 h2 r90
  text "CH" at 9.85,49.599 h2 r90
  text "CO" at 6.8,49.349 h2 r90
  text "VAR" at 4.625,47.743 h2 r90

## Text inside footprints (layer, text, board x,y; h text height)
C1: Top Overlay "+" at 40.587,48.498 h1.2 r90
C9: Top Overlay "+" at 28.134,8.477 h1.52 r90
C10: Top Overlay "+" at 50.823,22.334 h1.52 r180
C11: Top Overlay "+" at 42.448,36.713 h1.2
D2: Top Overlay "*" at 21.619,8.045 h1.27 r180; Mechanical 13 "*" at 19.725,8.768 h1.27 r180
JP1: Top Overlay "2" at 27.933,63.48 h1.27 r90; Top Overlay "1" at 30.473,63.988 h1.27 r90; Top Overlay "7" at 30.473,75.164 h1.27 r90; Top Overlay "8" at 27.933,75.164 h1.27 r90